# EAGLE board RBNodeMCUAQM (EAGLE 8.1.0)
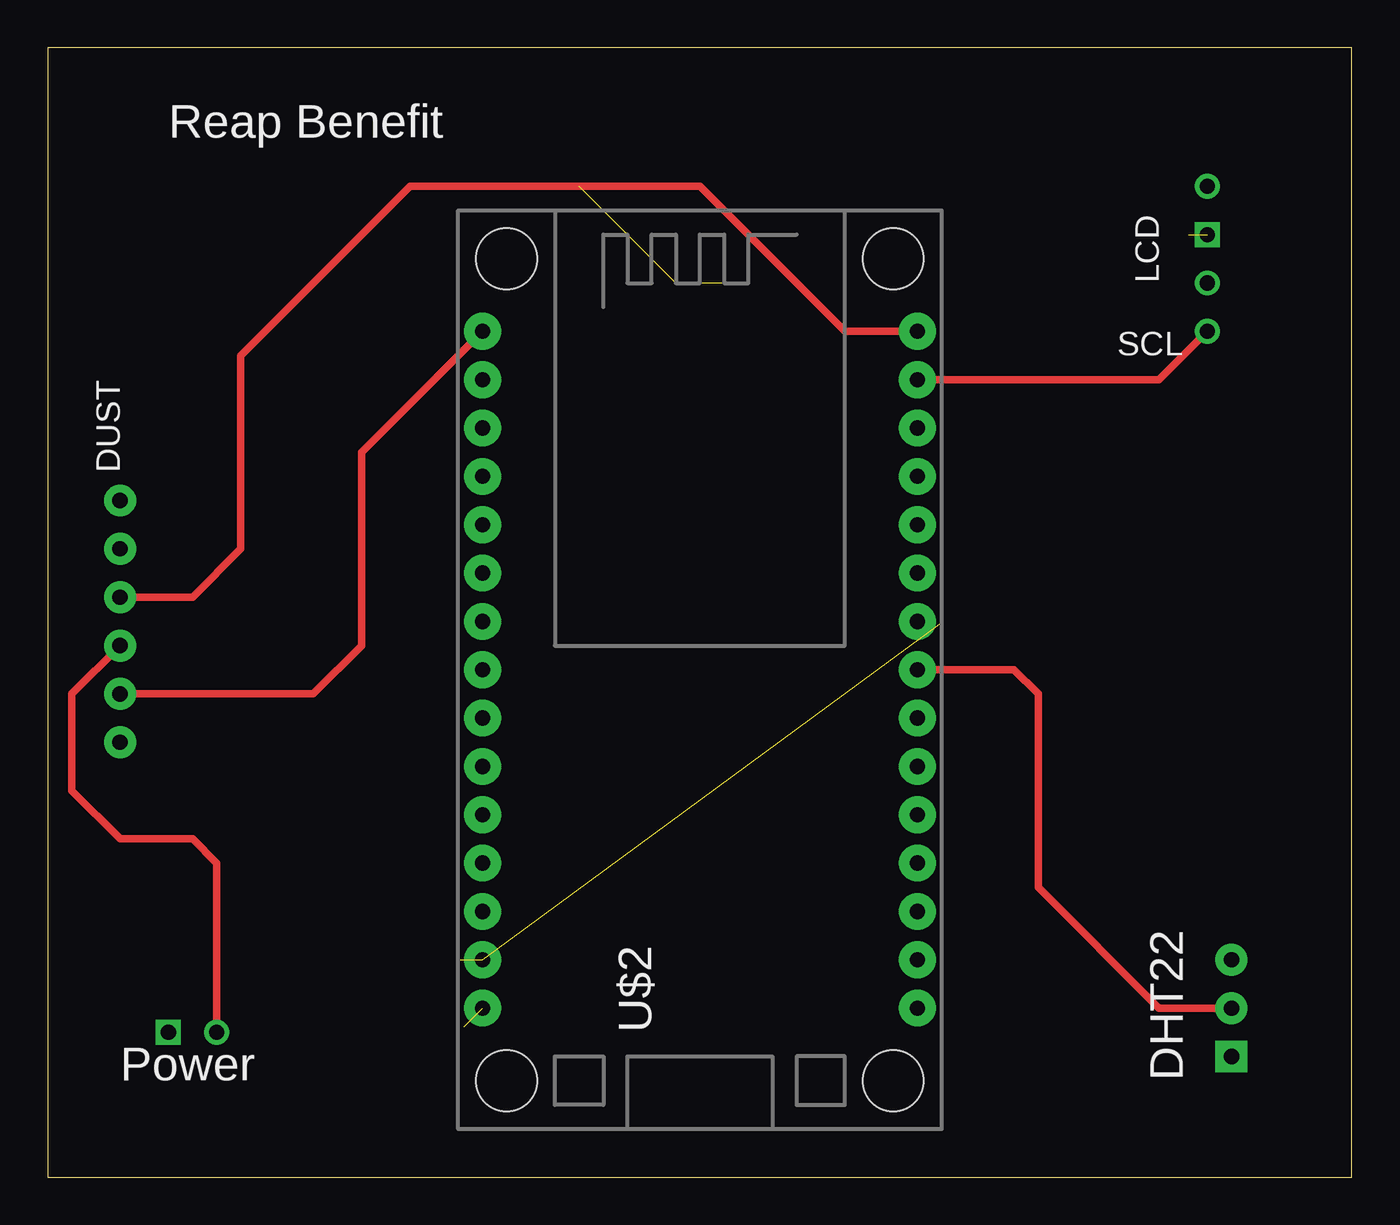
[diagram p0: board, top side]
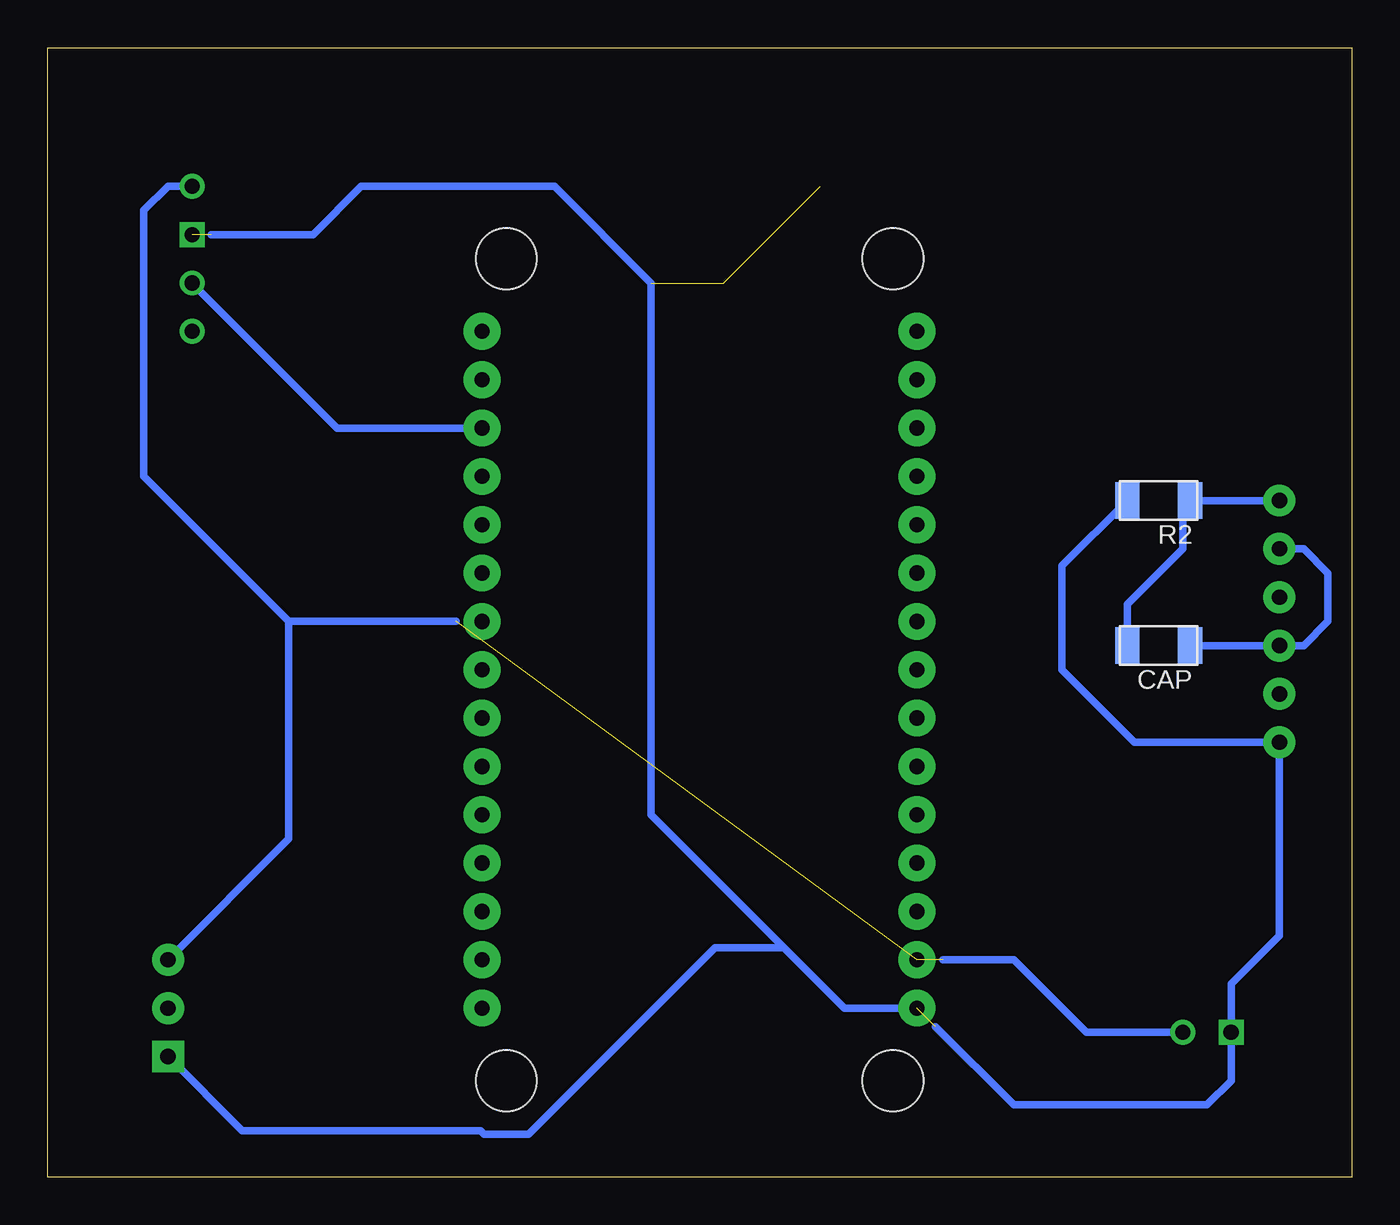
[diagram p1: board, bottom side, seen from below]

Size 68.56 x 59.36 mm. Coordinates in mm from the lower left corner, seen from the top.
Outline: 0,0 68.56,0 68.56,59.36 0,59.36 0,0
Copper layers (1*16): Top 0.035mm / dielectric 1.5mm / Bottom 0.035mm
Design rules "SparkFun": minimum track width 8mil, minimum drill 20mil, track to track 8mil, track to pad 8mil, pad to pad 8mil, via to via 8mil, smd to smd 8mil, copper to edge 8mil, drill to drill 8mil, minimum pad ring 12mil, minimum via ring 10mil, stop-mask expansion 4mil, vias tented up to drill 20mil, thermal gap 10mil

## Footprints (pad centres in the part's own frame; a part is rotated, then mirrored left to right if it is on the bottom)
C1206FAB = smd 1.27 x 1.905: 1 -1.651,0; 2 1.651,0
R1206FAB = smd 1.27 x 1.905: 1 -1.651,0; 2 1.651,0
ESP12E_DEVKIT = drill 0.8 pad 1.93: 3V3@0 -11.43,-7.62; 3V3@1 11.43,5.08; 3V3@2 11.43,-17.78; AD0 -11.43,17.78; CLK -11.43,-2.54; CMD -11.43,2.54; D0 11.43,17.78; D1 11.43,15.24; D2 11.43,12.7; D3 11.43,10.16; D4 11.43,7.62; D5 11.43,0; D6 11.43,-2.54; D7 11.43,-5.08; D8 11.43,-7.62; EN -11.43,-10.16; GND@0 -11.43,-5.08; GND@1 -11.43,-15.24; GND@2 11.43,2.54; GND@3 11.43,-15.24; RST -11.43,-12.7; RSV@0 -11.43,15.24; RSV@1 -11.43,12.7; RX 11.43,-10.16; SD0 -11.43,0; SD1 -11.43,5.08; SD2 -11.43,7.62; SD3 -11.43,10.16; TX 11.43,-12.7; VIN -11.43,-17.78 | hole 3.2: -10.16,21.59; 10.16,21.59; 10.16,-21.59; -10.16,-21.59

## Placement (x,y rotation side)
CAP  220uF  [C1206FAB]  10.16,27.94 180 bottom
R2  150  [R1206FAB]  10.16,35.56 180 bottom
U$2  ESP12E_DEVKIT  [ESP12E_DEVKIT]  34.29,26.67 0 top

## Library data of the parts
CAP R2 = fab
U$2 = ESP12E_DEVKIT

## Nets
5V: R2.2 U$2.VIN
D5: U$2.D5
D-LED: U$2.D0
D-V-LED: CAP.2 R2.1
D-VO: U$2.AD0
GND: CAP.1 U$2.GND@1
SCL: U$2.D1
SDA: U$2.D2

## Tracks (layer width: path | path; a pad name or v marks a point on that pad's centre or on a via)
5V  (via drill 0.8, 0.8 pad 1.68)  (4 unrouted)
  Bottom 0.406: U$2.VIN 26.67,8.89 29.84,12.06 | 29.84,12.06 36.83,19.05 36.83,46.99 41.91,52.07 52.07,52.07 54.61,49.53 59.95,49.53 | 29.84,12.06 33.48,12.06 43.28,2.26 45.62,2.26 45.81,2.45 58.33,2.45 v62.23,6.35 | 21.89,7.92 17.78,3.81 7.62,3.81 6.35,5.08 v6.35,7.62 6.35,10.16 3.81,12.7 v3.81,22.86 11.43,22.86 15.24,26.67 15.24,32.13 R2.2
  other vias: 60.96,49.53
D5  (via drill 0.8 pad 1.68)
  Top 0.406: U$2.D5 50.8,26.67 52.07,25.4 52.07,15.24 58.42,8.89 v62.23,8.89
D-LED  (via drill 0.8 pad 1.68)
  Top 0.406: v3.81,30.48 7.62,30.48 10.16,33.02 10.16,43.18 19.05,52.07 34.29,52.07 41.91,44.45 U$2.D0
D-V-LED  (via drill 0.8 pad 1.68)
  Bottom 0.406: v3.81,35.56 R2.1 8.89,35.18 8.89,33.02 11.81,30.1 CAP.2
D-VO  (via drill 0.8 pad 1.68)
  Top 0.406: v3.81,25.4 13.97,25.4 16.51,27.94 16.51,38.1 U$2.AD0
GND  (via drill 0.8, 0.8 pad 1.68)  (2 unrouted)
  Top 0.406: v3.81,27.94 1.27,25.4 1.27,20.32 3.81,17.78 7.62,17.78 8.89,16.51 v8.89,7.62
  Bottom 0.406: v60.96,52.07 62.23,52.07 63.5,50.8 63.5,36.83 55.88,29.21 | 55.88,29.21 47.09,29.21 | 55.88,29.21 55.88,17.78 v62.23,11.43 | CAP.1 v3.81,27.94 2.54,27.94 1.27,29.21 1.27,31.75 2.54,33.02 v3.81,33.02 | v8.89,7.62 13.97,7.62 17.78,11.43 21.49,11.43
SCL  (via drill 0.8)
  Top 0.406: U$2.D1 58.42,41.91 v60.96,44.45
SDA  (via drill 0.8)
  Bottom 0.406: U$2.D2 53.34,39.37 v60.96,46.99

## Text on the board
tNames: Reap Benefit | LCD | SCL | DUST | Power | DHT22